# Altium PCB ARDUINO DUE_2021-11-28.pcbdoc
Units mil, origin at the board's own origin, x right, y up, seen from the top; angles counter-clockwise.
Board outline 5290 x 3120 mil, 2 copper layers (Top Layer, Bottom Layer); 1 components, 0 nets, 92 pads, 0 vias.
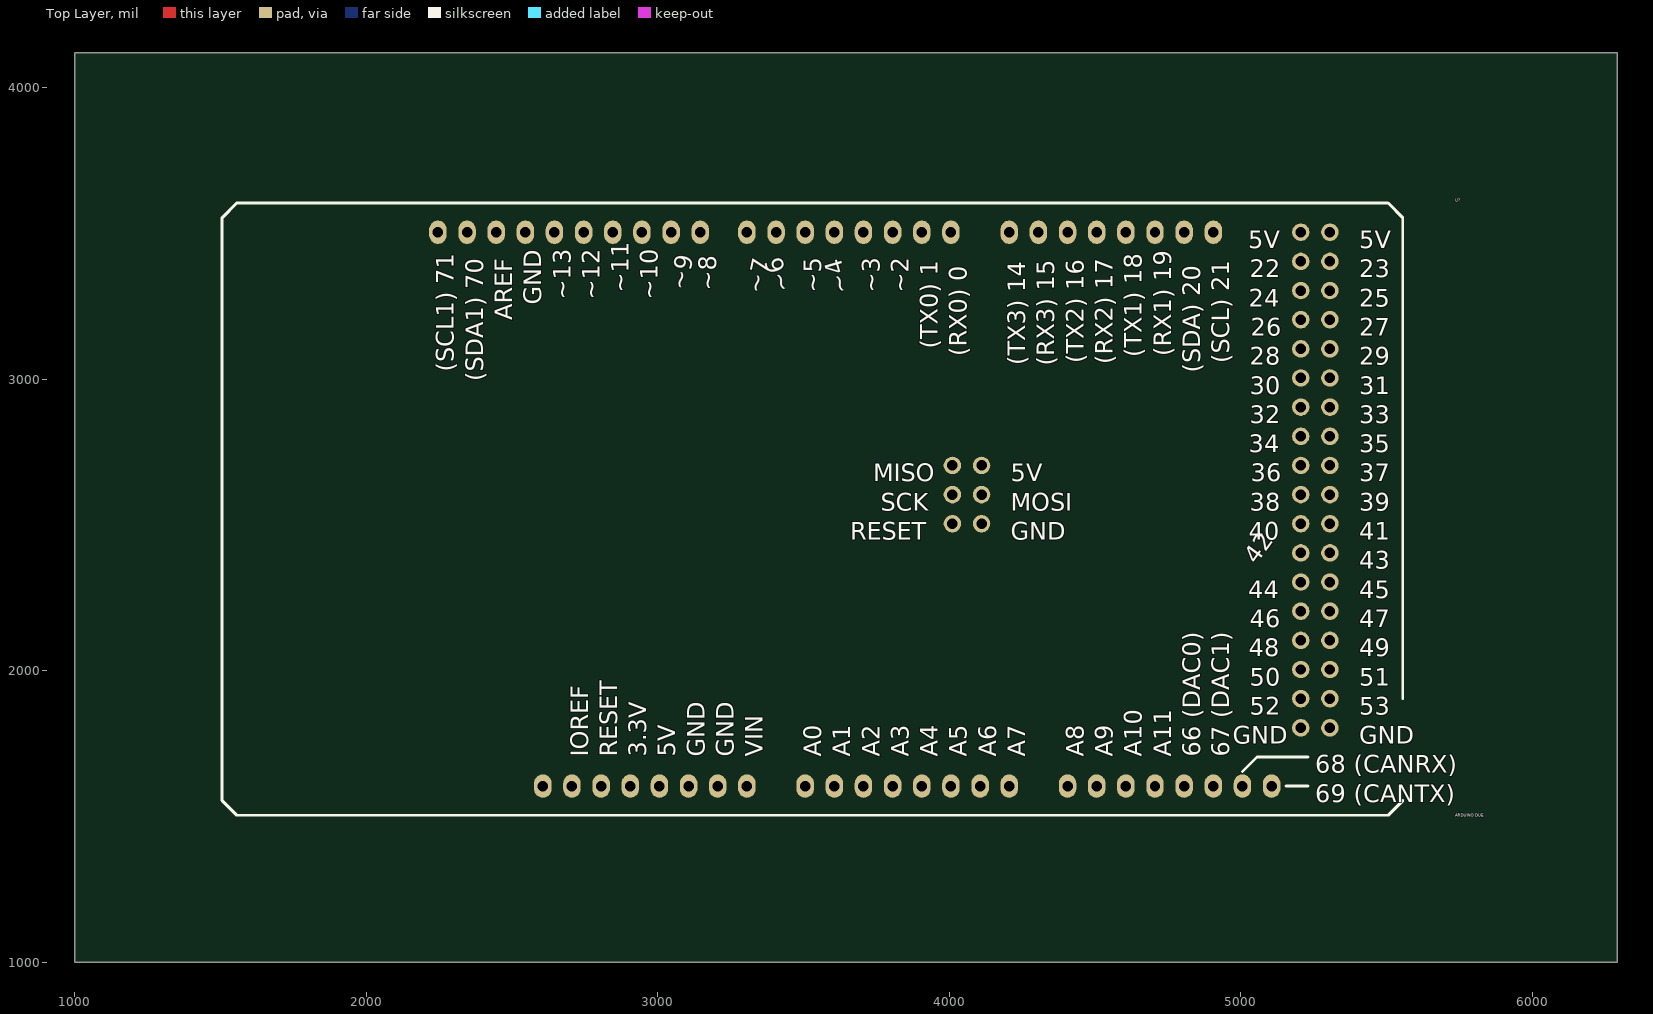
[diagram p0: Top Layer view]
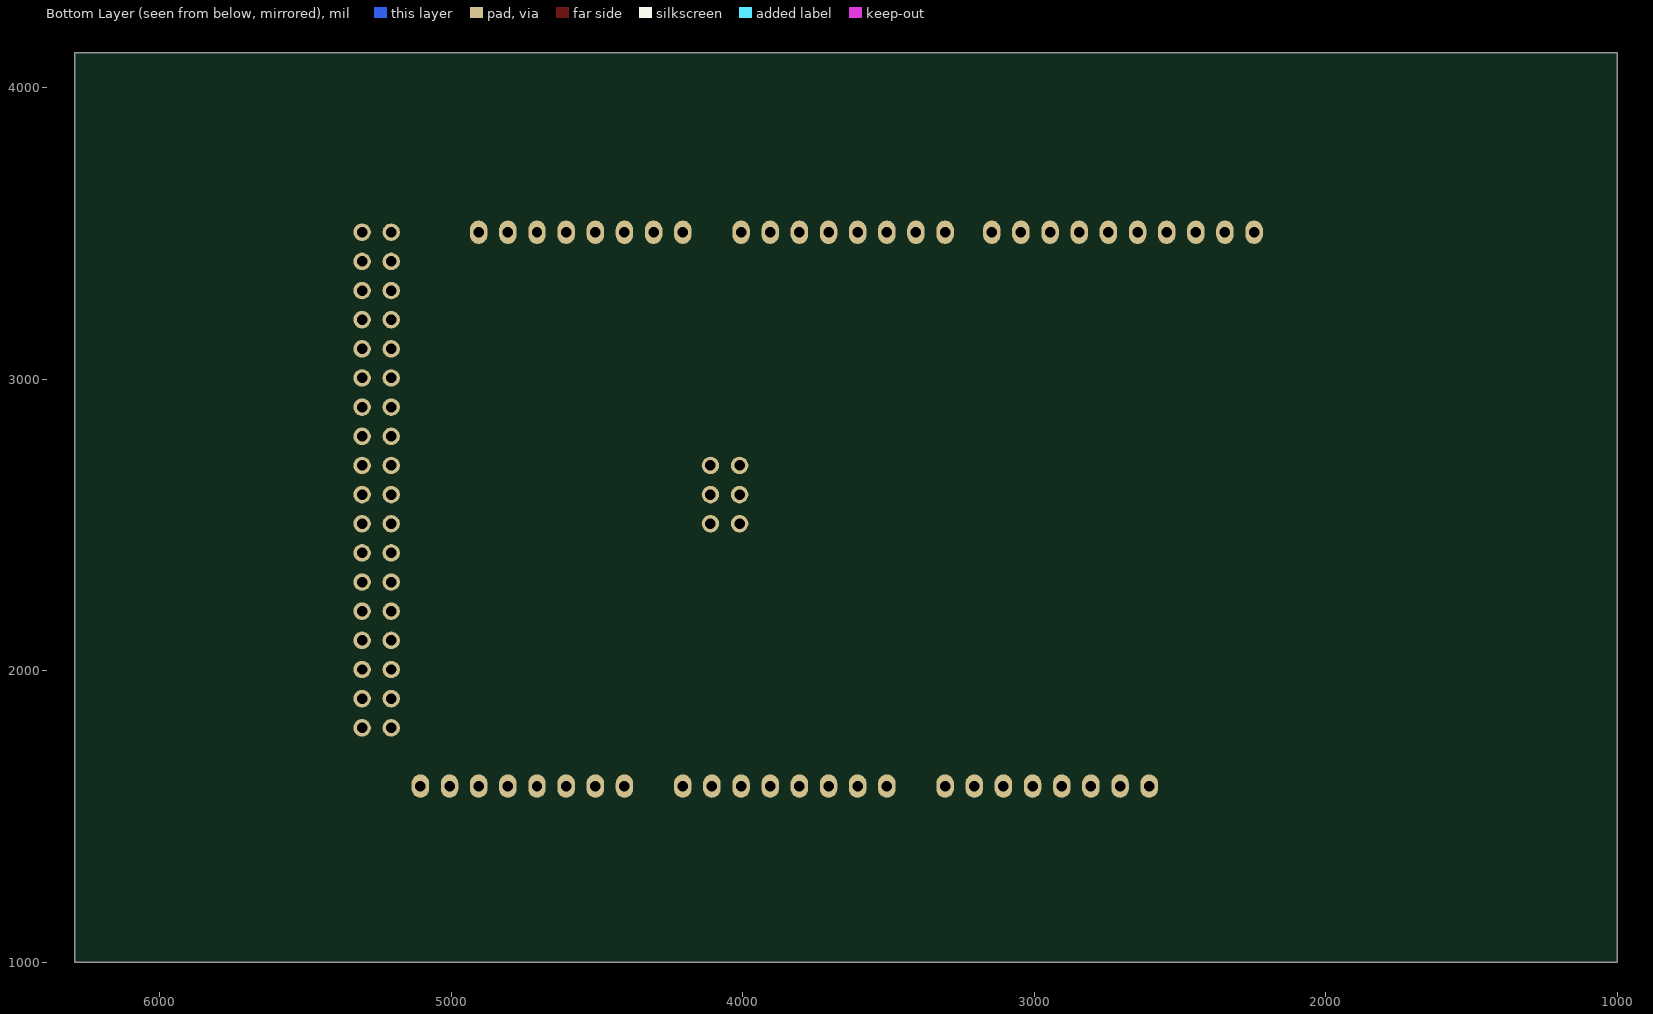
[diagram p1: Bottom Layer view, seen from below]

## Layer stack, top to bottom
Top Layer: signal copper (thickness not stored)
Dielectric: dielectric 12.6, FR-4, Dk 4.8
Bottom Layer: signal copper (thickness not stored)

## Board outline
6290,1000 1000,1000 1000,4120 6290,4120

## Components (designator, comment, footprint, x,y, rotation, side; value= is the part's Value field where it differs from the comment)
U? "ARDUINO DUE" "ARDUINO DUE" 3617.5,2555 r0 top

## Footprints (in the part's own frame and the unit in brackets; to place one, negate y for a bottom-side part, rotate by r counter-clockwise, add the part's x,y. Pads: shape width x height; smd on the part's side, far side on the other; paste and mask are expansions set on the pad)
"ARDUINO DUE" [mil]
  oval 60x80 hole 36: 0(387.5,950) 1(287.5,950) 2(187.5,950) 3(87.5,950) 3.3V(-712.5,-950) 4(-12.5,950) 5(-112.5,950) 5V(-612.5,-950) 6(-212.5,950) 7(-312.5,950) 8(-472.5,950) 9(-572.5,950) 10(-672.5,950) 11(-772.5,950) 12(-872.5,950) 13(-972.5,950) 14(587.5,950) 15(687.5,950) 16(787.5,950) 17(887.5,950) 18(987.5,950) 19(1087.5,950) 20(1187.5,950) 21(1287.5,950) 54(-112.5,-950) 55(-12.5,-950) 56(87.5,-950) 57(187.5,-950) 58(287.5,-950) 59(387.5,-950) 60(487.5,-950) 61(587.5,-950) 62(787.5,-950) 63(887.5,-950) 64(987.5,-950) 65(1087.5,-950) 66(1187.5,-950) 67(1287.5,-950) 68(1387.5,-950) 69(1487.5,-950) 70(-1272.5,950) 71(-1372.5,950) AREF(-1172.5,950) GND(-1072.5,950) GND(-512.5,-950) GND(-412.5,-950) IOREF(-912.5,-950) "NOT USED"(-1012.5,-950) RESET(-812.5,-950) VIN(-312.5,-950)
  round 60 hole 36: 5V(492.51,150) 5V(1587.5,950) 5V(1687.5,950) 22(1587.5,850) 23(1687.5,850) 24(1587.5,750) 25(1687.5,750) 26(1587.5,650) 27(1687.5,650) 28(1587.5,550) 29(1687.5,550) 30(1587.5,450) 31(1687.5,450) 32(1587.5,350) 33(1687.5,350) 34(1587.5,250) 35(1687.5,250) 36(1587.5,150) 37(1687.5,150) 38(1587.5,50) 39(1687.5,50) 40(1587.5,-50) 41(1687.5,-50) 42(1587.5,-150) 43(1687.5,-150) 44(1587.5,-250) 45(1687.5,-250) 46(1587.5,-350) 47(1687.5,-350) 48(1587.5,-450) 49(1687.5,-450) 50(1587.5,-550) 51(1687.5,-550) 52(1587.5,-650) 53(1687.5,-650) 74(392.51,150) 75(492.51,50) 76(392.51,50) GND(492.51,-50) GND(1587.5,-750) GND(1687.5,-750) RESET(392.51,-50)
  silkscreen extent -2112,-1050 1938,1050

## Nets (pads, with @x,y where several pads share a name; then routed paths per layer and width w, separated by ;. In a path a pad name is that pad's centre, name@x,y a point inside that pad or via, vN(x,y) a via of type N, cw(c..) or ccw(c..) an arc to the next point about the centre after c; other vN are vias at no path point)
pads on no net: "U?.NOT USED" U?.0 U?.1 U?.2 U?.3 U?.3.3V U?.4 U?.5 U?.5V U?.6 U?.7 U?.8 U?.9 U?.10 U?.11 U?.12 U?.13 U?.14 U?.15 U?.16 U?.17 U?.18 U?.19 U?.20 U?.21 U?.22 U?.23 U?.24 U?.25 U?.26 U?.27 U?.28 U?.29 U?.30 U?.31 U?.32 U?.33 U?.34 U?.35 U?.36 U?.37 U?.38 U?.39 U?.40 U?.41 U?.42 U?.43 U?.44 U?.45 U?.46 U?.47 U?.48 U?.49 U?.50 U?.51 U?.52 U?.53 U?.54 U?.55 U?.56 U?.57 U?.58 U?.59 U?.60 U?.61 U?.62 U?.63 U?.64 U?.65 U?.66 U?.67 U?.68 U?.69 U?.70 U?.71 U?.74 U?.75 U?.76 U?.AREF U?.GND U?.IOREF U?.RESET U?.VIN

## Text inside footprints (layer, text, board x,y; h text height)
U?: Document "66 (DAC0/CANRX1)" at 4860,1705 h60 r90; Document "53 (CANTX1)" at 5405,1850 h60; Top Overlay "(SCL1) 71" at 2300,3026.8 h60 r90; Top Overlay "(SDA1) 70" at 2400,2994.1 h60 r90; Top Overlay "AREF" at 2500,3203.6 h60 r90; Top Overlay "GND" at 2600,3257 h60 r90; Top Overlay "~13" at 2700,3273.4 h60 r90; Top Overlay "~12" at 2800,3273.4 h60 r90; Top Overlay "~11" at 2900,3297.9 h60 r90; Top Overlay "~10" at 3000,3273.4 h60 r90; Top Overlay "~9" at 3099.45,3302.08 h60 r79; Top Overlay "~8" at 3200,3305 h60 r90; Top Overlay "(RX0) 0" at 4060,3080 h60 r90; Top Overlay "(TX0) 1" at 3960,3104.5 h60 r90; Top Overlay "~2" at 3860,3297.6 h60 r90; Top Overlay "~3" at 3760,3297.6 h60 r90; Top Overlay "~4" at 3658.84,3303.17 h60 r106; Top Overlay "~5" at 3560,3297.6 h60 r90; Top Overlay "~6" at 3458.53,3309.67 h60 r108; Top Overlay "~7" at 3359.34,3291.36 h60 r78; Top Overlay "(TX3) 14" at 4260,3049.51 h60 r90; Top Overlay "(RX3) 15" at 4360,3047.3 h60 r90; Top Overlay "(TX2) 16" at 4460,3055.01 h60 r90; Top Overlay "(RX2) 17" at 4560,3052.21 h60 r90; Top Overlay "(TX1) 18" at 4660,3076.81 h60 r90; Top Overlay "(RX1) 19" at 4760,3079.51 h60 r90; Top Overlay "(SDA) 20" at 4860,3022.3 h60 r90; Top Overlay "(SCL) 21" at 4960,3055 h60 r90; Top Overlay "22" at 5030,3350 h60; Top Overlay "23" at 5405,3350 h60; Top Overlay "24" at 5027.3,3250 h60; Top Overlay "25" at 5405,3250 h60; Top Overlay "26" at 5032.8,3150 h60; Top Overlay "27" at 5405,3150 h60; Top Overlay "28" at 5030,3050 h60; Top Overlay "29" at 5405,3050 h60; Top Overlay "30" at 5030,2950 h60; Top Overlay "31" at 5405,2950 h60; Top Overlay "32" at 5030,2850 h60; Top Overlay "33" at 5405,2850 h60; Top Overlay "34" at 5027.3,2750 h60; Top Overlay "35" at 5405,2750 h60; Top Overlay "36" at 5032.8,2650 h60; Top Overlay "37" at 5405,2650 h60; Top Overlay "38" at 5030,2550 h60; Top Overlay "39" at 5405,2550 h60; Top Overlay "40" at 5027.3,2450 h60; Top Overlay "41" at 5405,2450 h60; Top Overlay "42" at 5051.57,2362.37 h60 r54; Top Overlay "43" at 5405,2350 h60; Top Overlay "44" at 5024.6,2250 h60; Top Overlay "45" at 5405,2250 h60; Top Overlay "46" at 5030,2150 h60; Top Overlay "47" at 5405,2150 h60; Top Overlay "48" at 5027.3,2050 h60; Top Overlay "49" at 5405,2050 h60; Top Overlay "50" at 5030,1950 h60; Top Overlay "51" at 5405,1950 h60; Top Overlay "52" at 5030,1850 h60; Top Overlay "53" at 5405,1850 h60; Top Overlay "5V" at 5024.6,3450 h60; Top Overlay "5V" at 5405,3450 h60; Top Overlay "GND" at 4971.1,1750 h60; Top Overlay "GND" at 5405,1750 h60; Top Overlay "A0" at 3560,1705 h60 r90; Top Overlay "A1" at 3660,1705 h60 r90; Top Overlay "A2" at 3760,1705 h60 r90; Top Overlay "A3" at 3860,1705 h60 r90; Top Overlay "A4" at 3960,1705 h60 r90; Top Overlay "A5" at 4060,1705 h60 r90; Top Overlay "A6" at 4160,1705 h60 r90; Top Overlay "A7" at 4260,1705 h60 r90; Top Overlay "A8" at 4460,1705 h60 r90; Top Overlay "A9" at 4560,1705 h60 r90; Top Overlay "A10" at 4660,1705 h60 r90; Top Overlay "A11" at 4760,1705 h60 r90; Top Overlay "66 (DAC0)" at 4860,1705 h60 r90; Top Overlay "67 (DAC1)" at 4960,1705 h60 r90; Top Overlay "68 (CANRX)" at 5255,1650 h60; Top Overlay "69 (CANTX)" at 5255,1550 h60; Top Overlay "IOREF" at 2760,1705 h60 r90; Top Overlay "RESET" at 2860,1705 h60 r90; Top Overlay "3.3V" at 2960,1705 h60 r90; Top Overlay "5V" at 3060,1705 h60 r90; Top Overlay "GND" at 3160,1705 h60 r90; Top Overlay "GND" at 3260,1705 h60 r90; Top Overlay "VIN" at 3360,1705 h60 r90; Top Overlay "MISO" at 3738.01,2650 h60; Top Overlay "SCK" at 3764.21,2550 h60; Top Overlay "RESET" at 3660.01,2450 h60; Top Overlay "5V" at 4210.01,2650 h60; Top Overlay "MOSI" at 4210.01,2550 h60; Top Overlay "GND" at 4210.01,2450 h60